# Altium PCB PCB1.PcbDoc
Units mm, origin at the board's own origin, x right, y up, seen from the top; angles counter-clockwise.
Board outline 48.75 x 36.75 mm, 2 copper layers (Top Layer, Bottom Layer); 17 components, 9 nets, 46 pads, 8 vias.
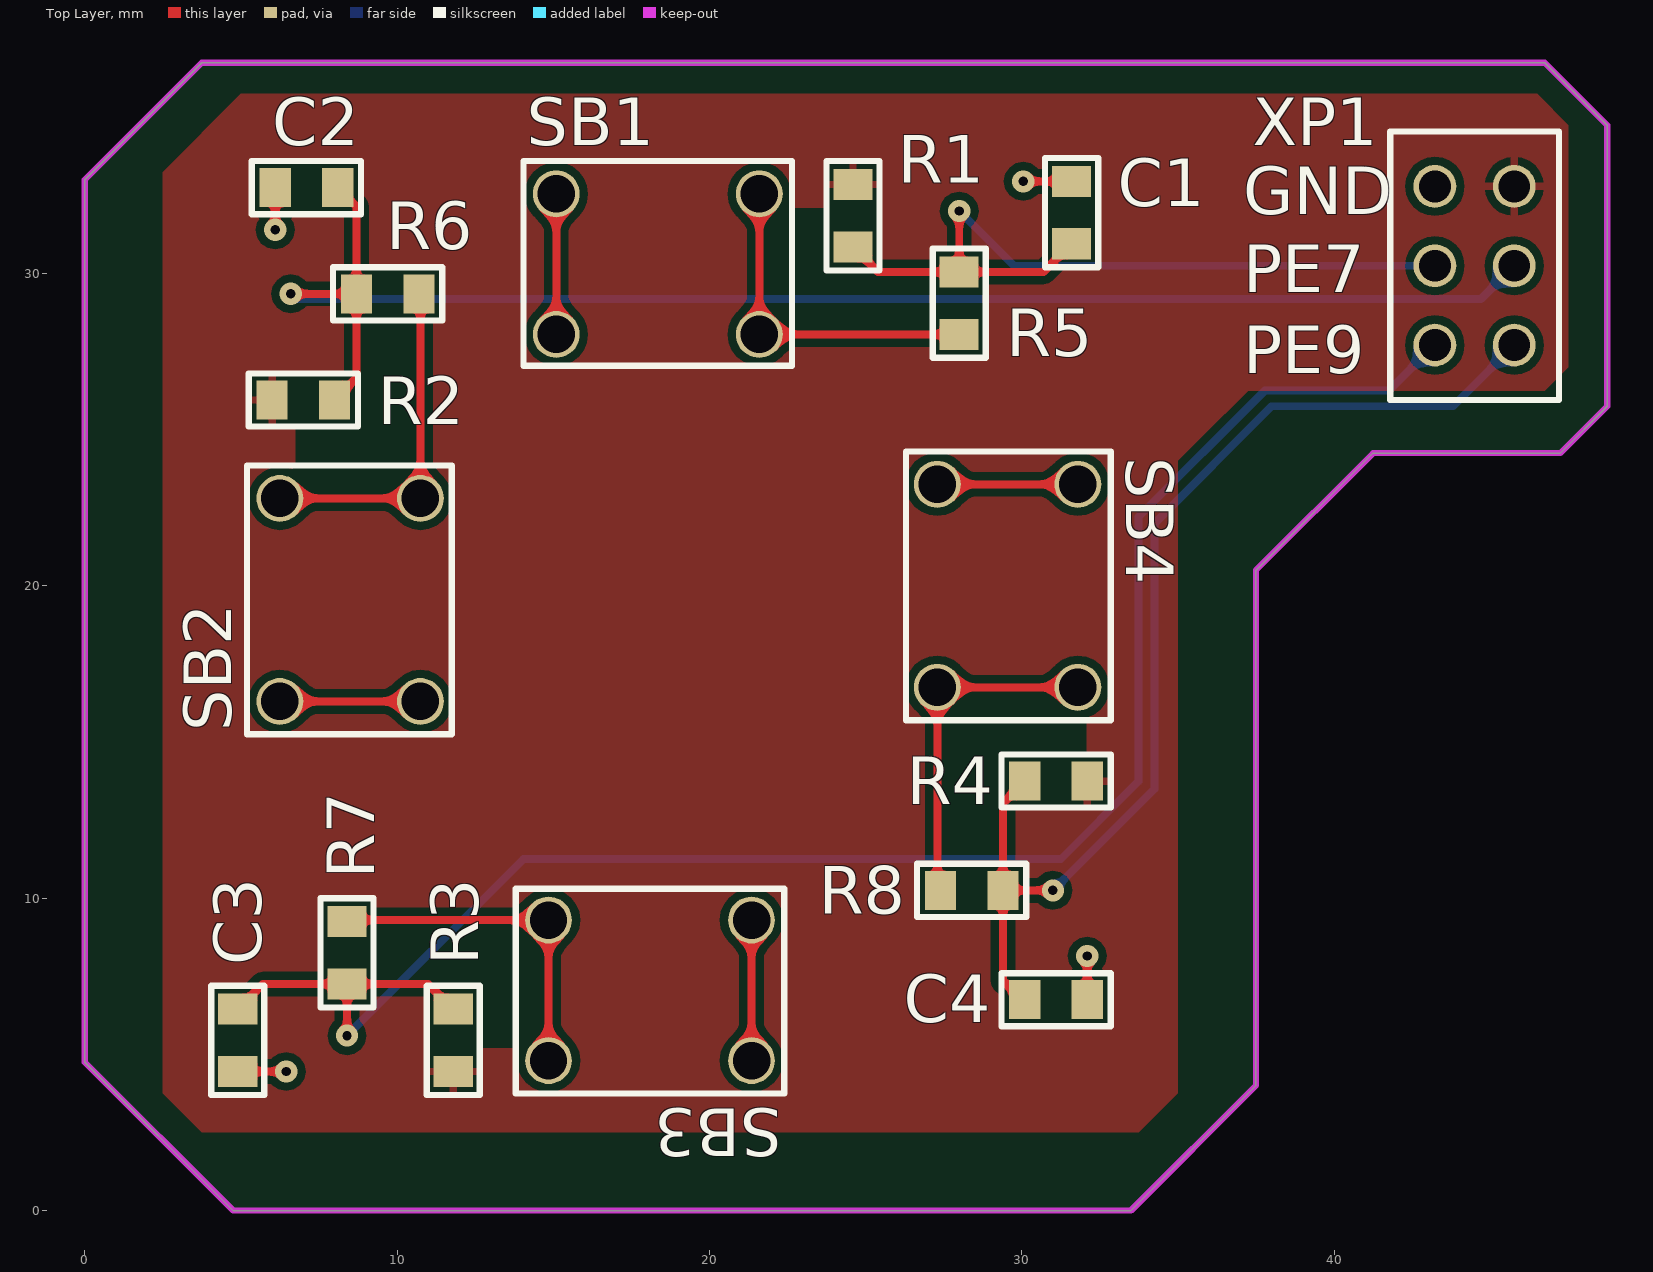
[diagram p0: Top Layer view]
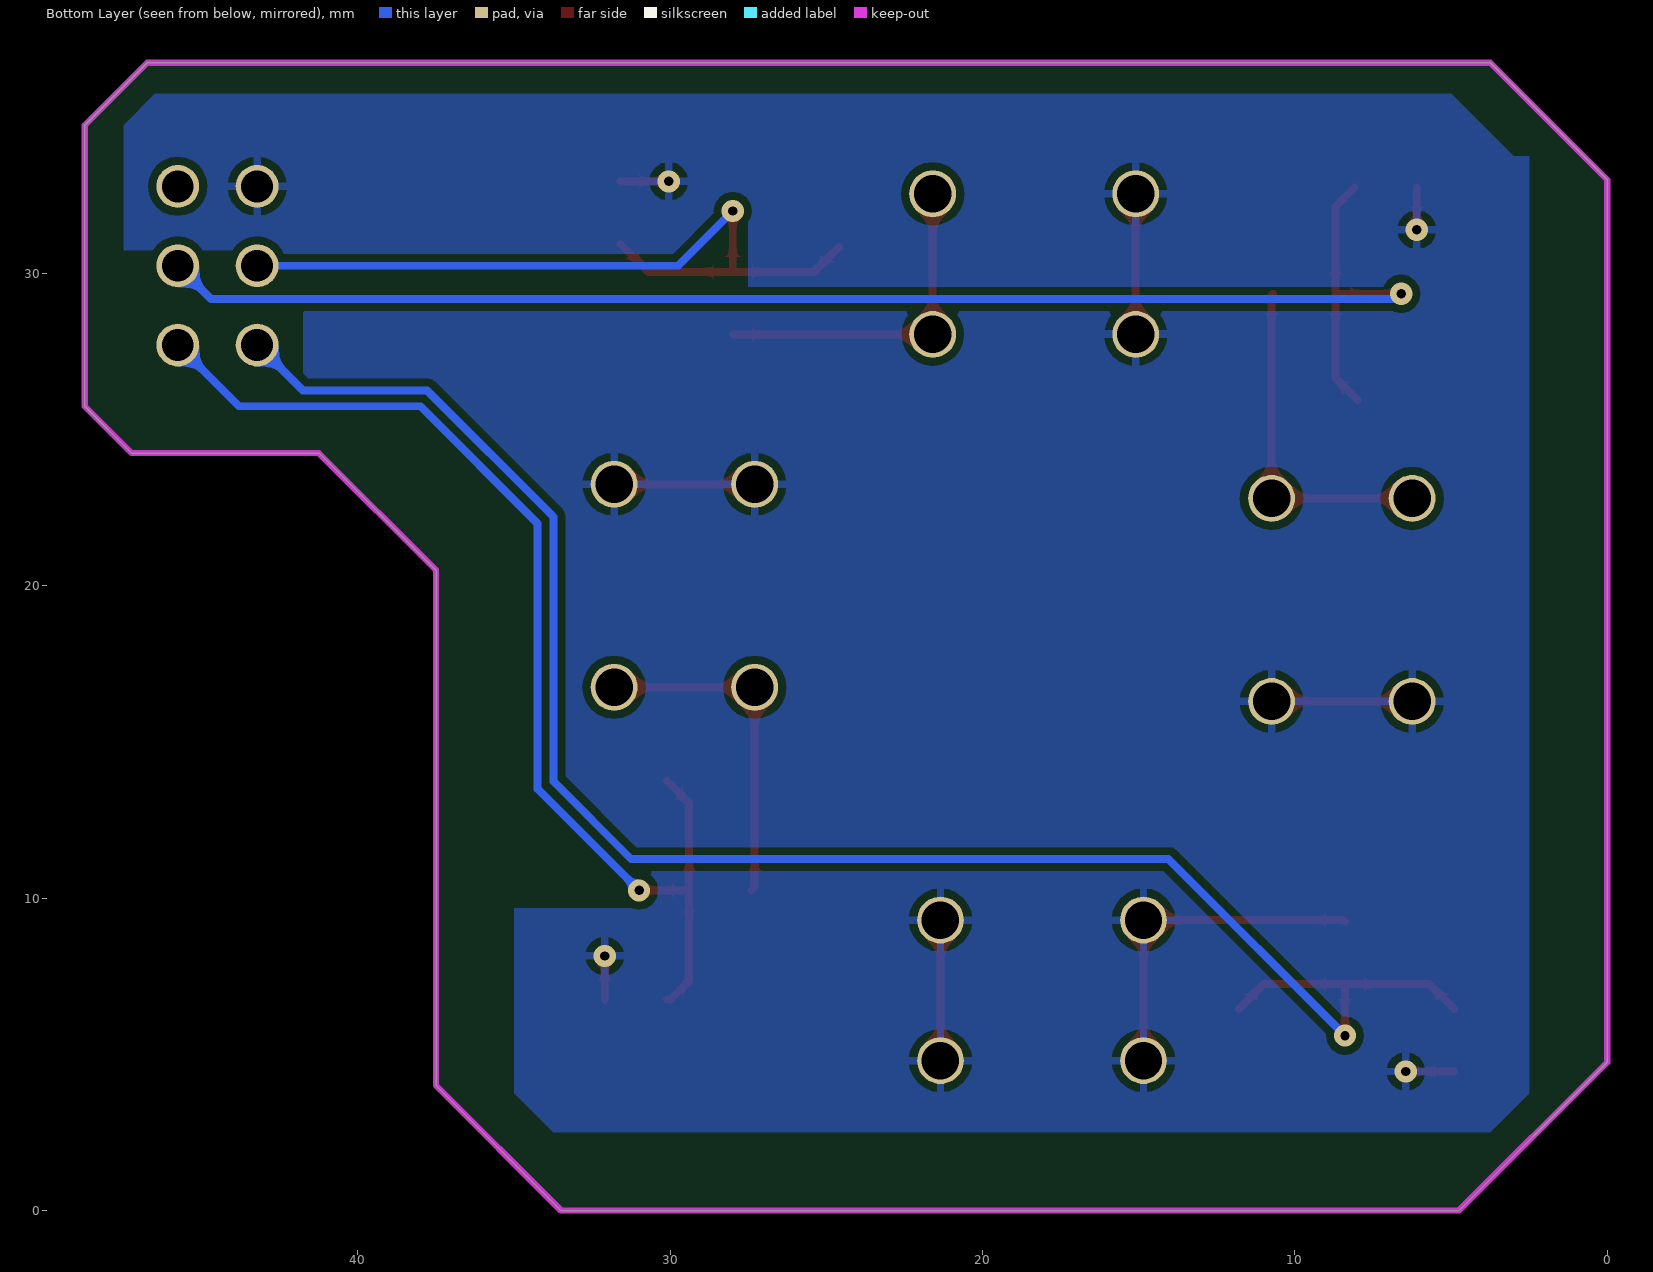
[diagram p1: Bottom Layer view, seen from below]
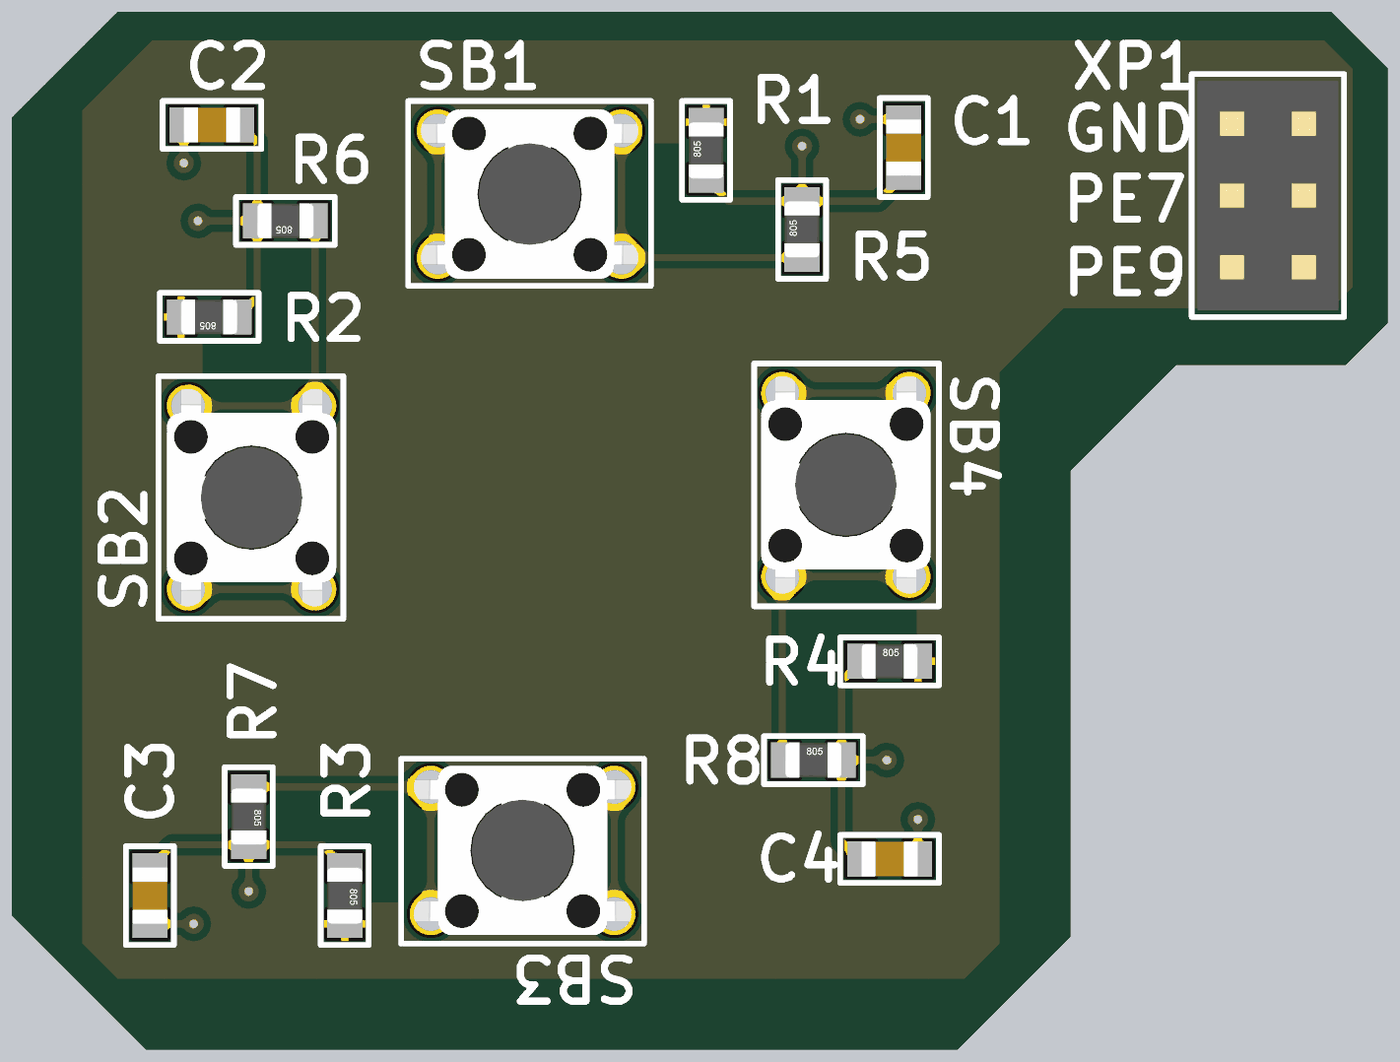
[diagram p2: 3D render of the assembled board from above, using the file's embedded part models]

## Layer stack, top to bottom
Top Solder: solder mask 0.0102, Solder Resist, Dk 3.5
Top Layer: signal copper 0.0356
Dielectric 1: dielectric 0.32, FR-4, Dk 4.8
Bottom Layer: signal copper 0.0356
Bottom Solder: solder mask 0.0102, Solder Resist, Dk 3.5

## Board outline
0,4.75 0,33 3.75,36.75 46.75,36.75 48.75,34.75 48.75,25.75 47.25,24.25 41.25,24.25 37.5,20.5 37.5,4 33.5,0 4.75,0

## Design rules (kind name [scope] priority, off if disabled: settings)
Clearance [All] p1: gap=0.254 ignorepadtopadclearanceinfootprint=FALSE except(0: Arc-Hole Track-Hole SMDPad-Hole THPad-Hole Via-Hole Fill-Hole Poly-Hole Region-Hole Text-Hole)
PolygonConnect [All] p1: connectstyle=Relief reliefconductorwidth=0.254 reliefentries=4 polygonreliefangle="90 Angle" airgapwidth=0.254
RoutingVias [All] p1: holewidth=0.711 width=1.27 viastyle="Through Hole" minholewidth=0.3 minwidth=0.7 maxholewidth=0.711 maxwidth=1.27
SolderMaskExpansion [All] p1: expansion=0.102
Width [All] p1: maxlimit=0.7 minlimit=0.254 preferedwidth=0.254
30 further rules are at their usual default settings.

## Components (designator, comment, footprint, x,y, rotation, side; value= is the part's Value field where it differs from the comment)
C1 "0.1u" "Cap 0805" 31.6,31.95 r90 top
C2 "0.1u" "Cap 0805" 7.1,32.75 r180 top
C3 "0.1u" "Cap 0805" 4.9,5.45 r270 top
C4 "0.1u" "Cap 0805" 31.1,6.75 r0 top
R1 "10k" "Res 0805" 24.6,31.85 r90 top
R2 "10k" "Res 0805" 7,25.95 r180 top
R3 "10k" "Res 0805" 11.8,5.45 r270 top
R4 "10k" "Res 0805" 31.1,13.75 r0 top
R5 "1k" "Res 0805" 28,29.05 r90 top
R6 "1k" "Res 0805" 9.7,29.35 r180 top
R7 "1k" "Res 0805" 8.4,8.25 r270 top
R8 "1k" "Res 0805" 28.4,10.25 r0 top
SB1 "Switch" "Switch Tact" 18.35,30.3 r0 top
SB2 "Switch" "Switch Tact" 8.5,19.55 r90 top
SB3 "Switch" "Switch Tact" 18.1,7.05 r180 top
SB4 "Switch" "Switch Tact" 29.55,20 r270 top
XP1 "PBD-6" PBD-6 44.5,30.25 r270 top

## Footprints (in the part's own frame and the unit in brackets; to place one, negate y for a bottom-side part, rotate by r counter-clockwise, add the part's x,y. Pads: shape width x height; smd on the part's side, far side on the other; paste and mask are expansions set on the pad)
"Cap 0805" [mm]
  rect 1x1.25 smd: 1(-1,0) 2(1,0)
  silkscreen extent -1.75,-0.85 1.75,0.85, body extent -1,-0.62 1,0.63, height 1
PBD-6 [mm]
  round 1.37 hole 1.02: 1(-2.54,1.27) 2(-2.54,-1.27) 3(0,1.27) 4(0,-1.27) 5(2.54,1.27) 6(2.54,-1.27)
  silkscreen extent -4.3,-2.7 4.3,2.7, body extent -4.06,-2.5 4.06,2.5, height 5
"Res 0805" [mm]
  rect 1x1.25 smd: 1(-1,0) 2(1,0)
  silkscreen extent -1.75,-0.85 1.75,0.85, body extent -1,-0.62 1,0.63, height 0.78
"Switch Tact" [mm]
  round 1.5 hole 1.2: 1(-3.25,2.25) 2(3.25,2.25) 3(-3.25,-2.25) 4(3.25,-2.25)
  silkscreen extent -4.3,-3.25 4.3,3.3, body extent -3.95,-3 3.95,3, height 7.64

## Part data
C1 C2 C3 C4: library part Capacitor
R1 R2 R3 R4 R5 R6 R7 R8: library part Resistor
SB1 SB2 SB3 SB4: library part "Switch Tact"

## Via types
v1: diameter 0.711, hole 0.3, Top Layer to Bottom Layer, tented both sides, 7 vias
v2: diameter 0.71, hole 0.3, Top Layer to Bottom Layer, tented both sides, 1 vias

## Nets (pads, with @x,y where several pads share a name; then routed paths per layer and width w, separated by ;. In a path a pad name is that pad's centre, name@x,y a point inside that pad or via, vN(x,y) a via of type N, cw(c..) or ccw(c..) an arc to the next point about the centre after c; other vN are vias at no path point)
+5V: R1.2 R2.2 R3.2 R4.2 XP1.1
Button1: C1.1 R1.1 R5.2 XP1.4 | length 25.6
  Top Layer w0.254: R1.1 25.4,30.05 R5.2 ; v1(28,32) R5.2 ; C1.1 30.7,30.05 R5.2
  Bottom Layer w0.254: v1(28,32) 29.75,30.25 XP1.4
Button2: C2.1 R2.1 R6.2 XP1.3 | length 49.1
  Top Layer w0.254: v1(6.6,29.35) R6.2 ; R2.1 8.7,26.65 R6.2 ; C2.1 8.7,32.15 R6.2
  Bottom Layer w0.254: v1(6.6,29.35) 6.766,29.184 44.704,29.184 XP1.3
Button3: C3.1 R3.1 R7.2 XP1.6 | length 58.2
  Top Layer w0.254: C3.1 5.7,7.25 R7.2 ; v1(8.4,5.6) R7.2 ; R3.1 11,7.25 R7.2
  Bottom Layer w0.254: v1(8.4,5.6) 14.05,11.25 31.25,11.25 33.742,13.742 33.742,22.21 37.79,26.258 41.758,26.258 43.21,27.71 XP1.6
Button4: C4.1 R4.1 R8.2 XP1.5 | length 36.2
  Top Layer w0.254: C4.1 30,6.75 29.4,7.35 R8.2 ; R4.1 29.4,13.05 R8.2 ; v1(31,10.25) R8.2
  Bottom Layer w0.254: v1(31,10.25) 34.25,13.5 34.25,22 38,25.75 43.81,25.75 XP1.5
GND: C1.2 C2.2 C3.2 C4.2 R7.1 SB1.1 SB1.3 SB2.1 SB2.3 SB3.1 SB3.2 SB3.3 SB3.4 SB4.1 SB4.3 XP1.2 | length 34.4
  Top Layer w0.254: C3.2 v1(6.45,4.45) ; v1(6.1,31.4) C2.2 ; SB2.1 SB2.3 ; R7.1 8.45,9.3 SB3.4 SB3.2 ; SB1.3@15.1,28.55 SB1.1 ; SB3.3 SB3.1 SB3.1@21.4,4.75 ; SB4.3 SB4.1 ; v2(30.05,32.95) C1.2 ; C4.2 v1(32.1,8.15)
NetR5_1: R5.1 SB1.2 SB1.4 | length 10.4
  Top Layer w0.254: SB1.2@21.6,32.05 SB1.4 R5.1
NetR6_1: R6.1 SB2.2 SB2.4 | length 11.1
  Top Layer w0.254: SB2.2 SB2.4 10.75,29.3 R6.1
NetR8_1: R8.1 SB4.2 SB4.4 | length 11
  Top Layer w0.254: R8.1 27.3,10.35 SB4.4 SB4.2

## Polygon pours and split planes (outlines as drawn)
GND on Bottom Layer "GND" (solid, pour order 0): 33.75,2.5 3.75,2.5 2.5,3.75 2.5,33.75 3,33.75 5,35.75 46.5,35.75 47.5,34.75 47.5,25.75 47,25.75 46.25,25 39.75,25 35,20.25 35,3.75
+5V on Top Layer "+5V" (solid, pour order 2): 2.5,3.75 3.75,2.5 33.75,2.5 35,3.75 35,24 35.75,24.75 37.25,26.25 46.75,26.25 47.5,27 47.5,34.75 46.5,35.75 5,35.75 2.5,33.25

## Keep-outs
Keep-Out Layer:
  lines w0.2: 0,4.75 0,33 3.75,36.75 31.75,36.75 46.75,36.75 48.75,34.75 48.75,25.75 47.25,24.25 41.25,24.25 37.5,20.5 37.5,4 33.5,0 4.75,0 0,4.75

## Other copper
Top Layer:
  pour cut-out: 30.721,31.704 30.721,32.196 32.479,32.196 32.479,31.704
  pour cut-out: 25.479,32.096 22.499,32.096 22.403,32 21.5,32 21.5,28.15 21.65,28 28.5,28 28.5,28.425 28.879,28.804 28.879,29.335 28.715,29.335 27.795,30.255 25.007,30.255 25.007,31.132 25.479,31.604
  pour cut-out: 6.854,33.629 7.346,33.629 7.346,31.871 6.854,31.871
  pour cut-out: 6.754,26.829 6.754,23.679 6.756,23.677 6.75,23.671 6.75,22.75 10.5,22.75 10.5,30 10.175,30 9.946,30.229 9.454,30.229 9.454,28.471 9.088,28.471 9.088,28.388 8.312,27.612 8.312,26.829
  pour cut-out: 12.679,5.204 14.304,5.204 14.85,5.75 14.659,5.941 14.659,8.297 12.679,6.317
  pour cut-out: 7.521,8.004 7.521,8.496 7.946,8.496 8.75,9.3 14.314,9.3 14.314,8.67 14.673,8.311 12.679,6.317 12.679,5.204 10.921,5.204 10.921,6.995 10.998,7.072
  pour cut-out: 4.021,5.204 4.021,5.696 5.779,5.696 5.779,5.204
  pour cut-out: 31.973,14.629 32.062,14.718 32.062,15.772 31.596,15.772 30.78,16.587 30.647,16.454 28.093,16.454 28.093,16.293 27.3,15.5 27.453,15.347 27.453,10.949 29.143,10.949 29.4,11.206 29.4,13
  pour cut-out: 30.854,12.871 31.346,12.871 31.346,14.629 30.854,14.629
  pour cut-out: 28.154,9.371 28.646,9.371 28.646,11.129 28.154,11.129
  pour cut-out: 31.346,7.629 30.854,7.629 30.854,5.871 31.346,5.871
Bottom Layer:
  pour cut-out: 31,9.634 31.047,9.681 35,9.681 35,19 40.75,24.75 42.25,24.75 42.25,25.25 42,25.5 37.75,25.5 34.25,22 34.25,13.5 31.25,10.5
  pour cut-out: 41.75,28.75 41.75,25 47.75,25 47.75,30.75 43.25,30.75
  pour cut-out: 27.393,32.044 27.5,31.937 27.5,29.5 43,29.5 42.75,29.75 42.75,30.5 29.5,30.5

## Silkscreen, mask and mechanical layers (free items; w line width, h text height)
Top Overlay:
  text "GND" at 37.1,31.9 h1.52
  text "PE7" at 37.1,29.4 h1.52
  text "PE9" at 37.1,26.8 h1.52